# Altium PCB mct5.PcbDoc (part 1 of 3)
Units mil, origin at the board's own origin, x right, y up, seen from the top; angles counter-clockwise.
Board outline 3925 x 3925 mil, 2 copper layers (TopLayer, BottomLayer); 78 components, 100 nets, 891 pads, 16 vias.
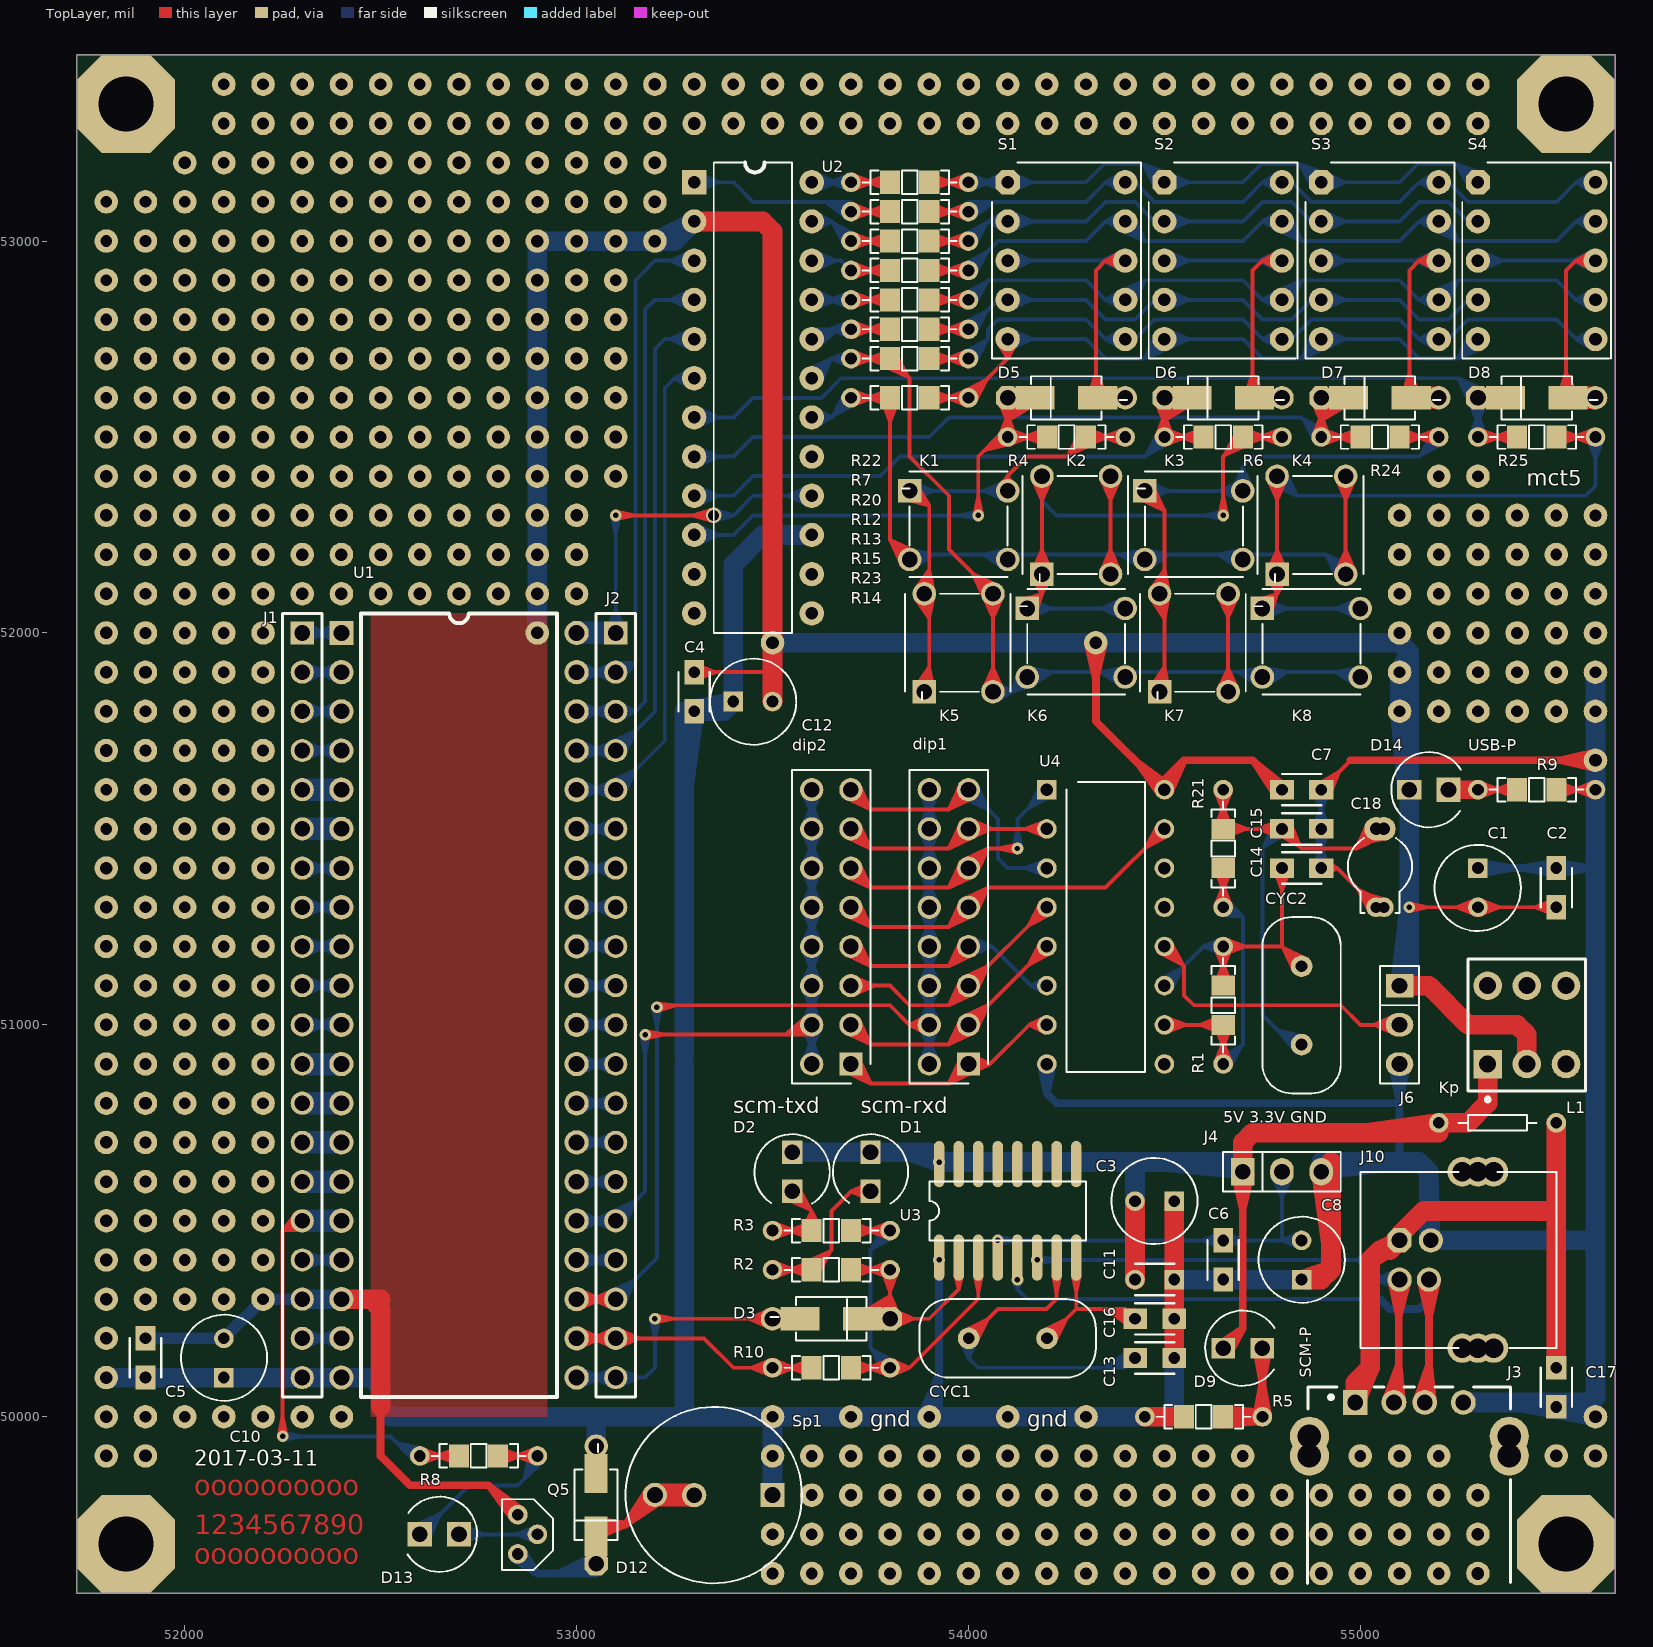
[diagram p0: TopLayer view]
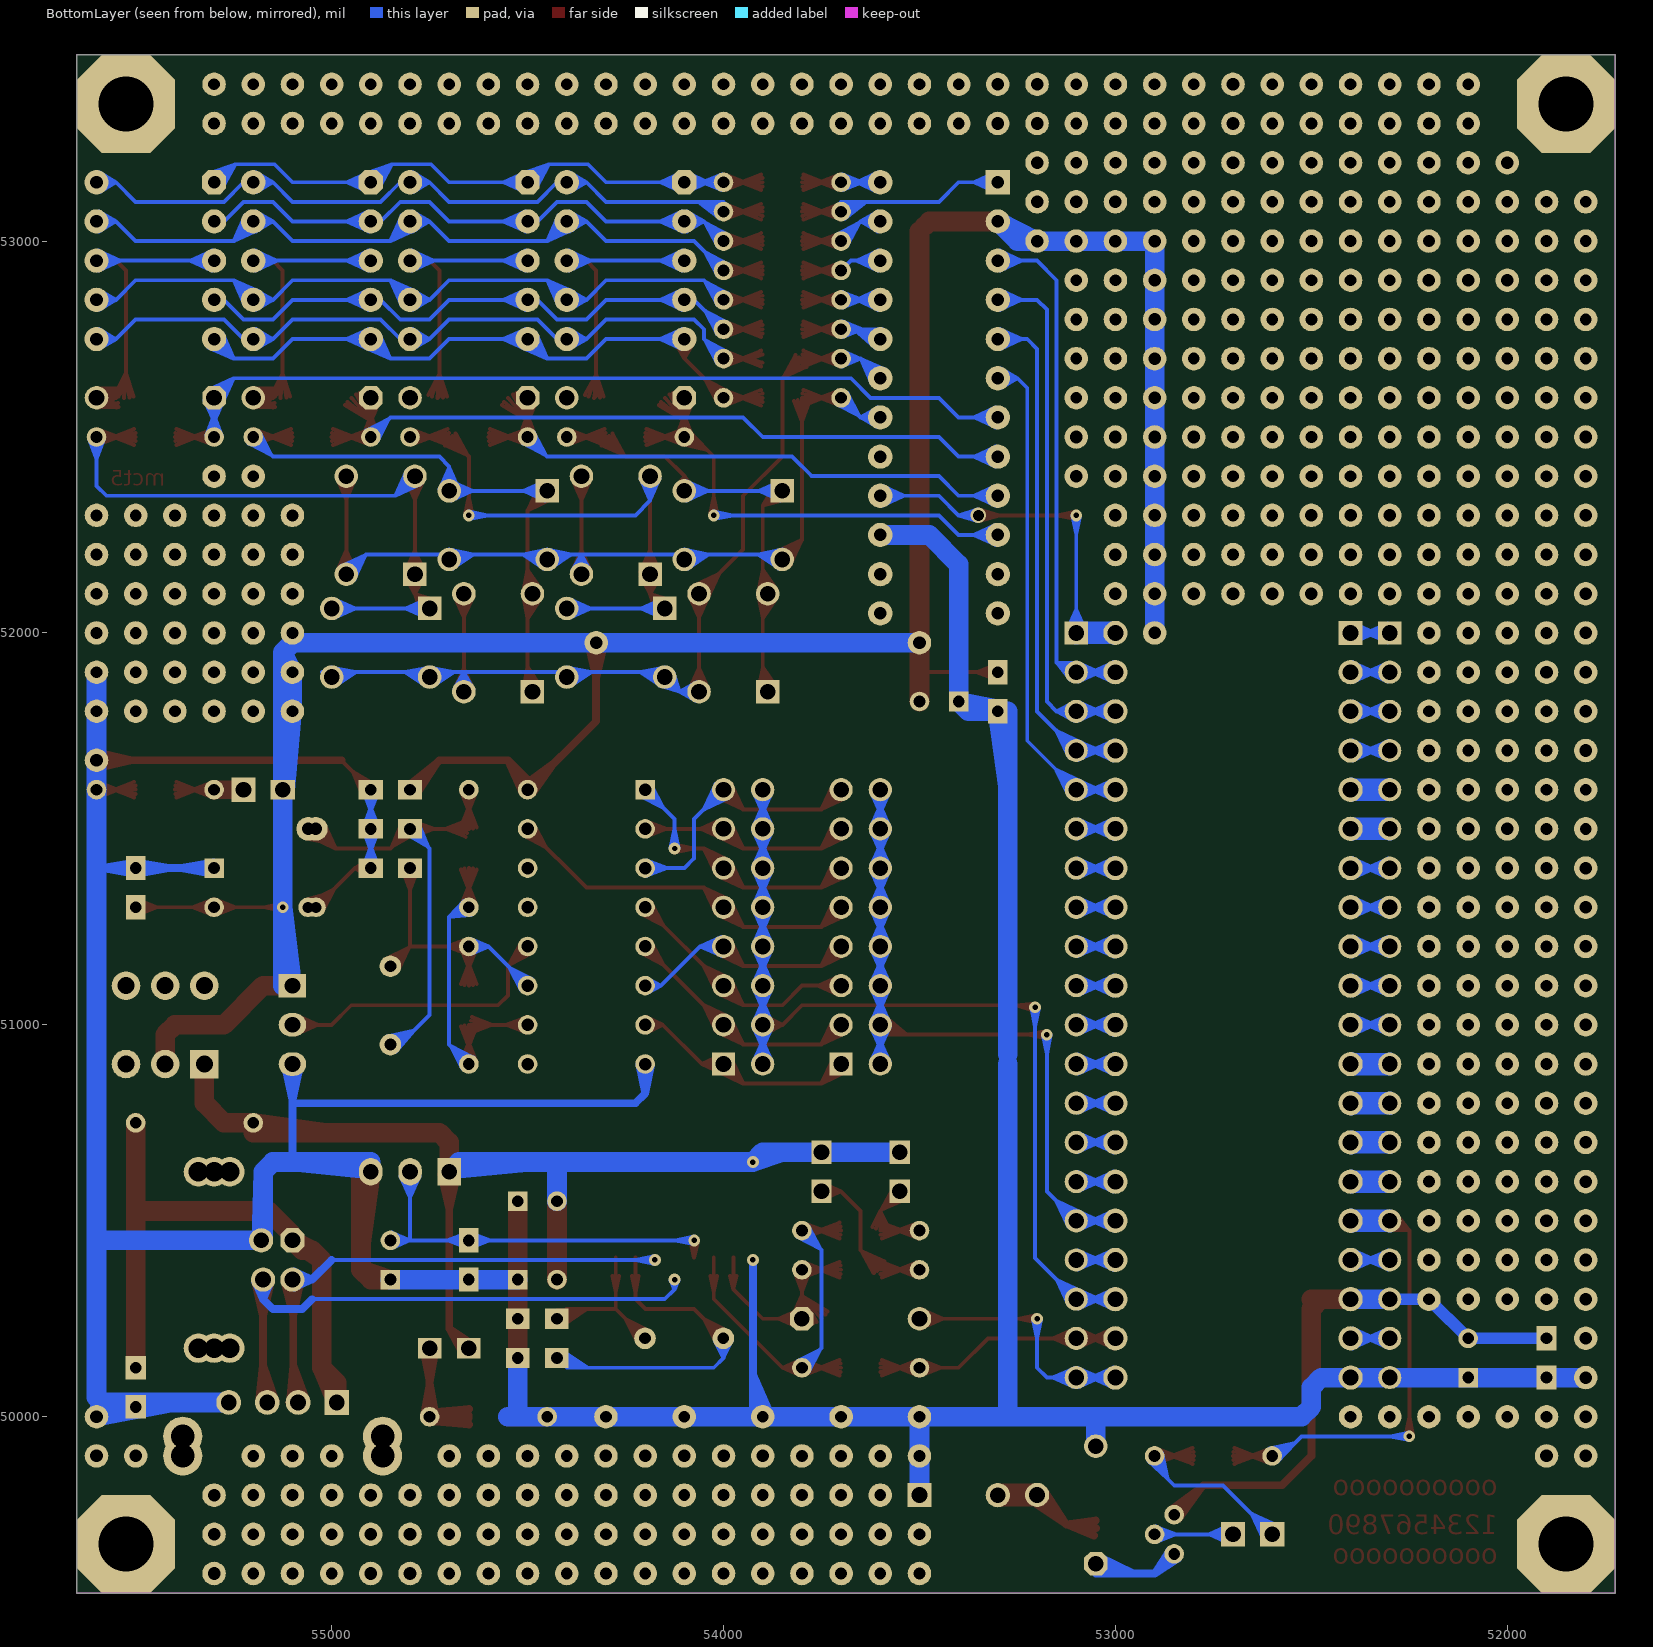
[diagram p1: BottomLayer view, seen from below]

## Layer stack, top to bottom
TopLayer: signal copper 1.4
Dielectric: core 12.6, FR-4, Dk 4.8
BottomLayer: signal copper 1.4

## Board outline
51725,49550 51725,53475 55650,53475 55650,49550

## Design rules (kind name [scope] priority, off if disabled: settings)
AssemblyTestPointUsage [All] p1 off:
AssemblyTestpoint [All] p1 off: testpointundercomponent=TRUE minsize=40 maxsize=100 preferedsize=60 minholesize=0 maxholesize=40 preferedholesize=32 testpointgrid=1 usegrid=TRUE gridtolerance=0.01 allowsidetop=TRUE allowsidebottom=TRUE
Clearance [All] p1: gap=10
ComponentClearance [All] p1 off: gap=10 collisioncheckmode=3 verticalgap=10 showdistances=FALSE
DiffPairsRouting [All] p1 off: maxlimit=10 minlimit=10 mostfreqgap=10 maxuncoupledlength=500
FabricationTestPointUsage TestPointUsage [All] p1 off: valid=0 allowmultiple=FALSE
FabricationTestpoint Testpoint [All] p1 off: side=3 testpointundercomponent=TRUE minsize=40 maxsize=100 preferedsize=60 minholesize=20 maxholesize=40 preferedholesize=32 testpointgrid=1 allowsidetop=TRUE allowsidebottom=TRUE usegrid=TRUE gridtolerance=0.01
FanoutControl Fanout_BGA [IsBGA] p1 off: bgadir=Out bgaviamode=Centered fanoutstyle=Auto fanoutdirection=Alternating viagrid=1 // Fanout_BGA (Default Rule)
FanoutControl Fanout_LCC [IsLCC] p2 off: bgadir=Out bgaviamode=Centered fanoutstyle=Auto fanoutdirection=Alternating viagrid=1 // Fanout_LCC (Default Rule)
FanoutControl Fanout_SOIC [IsSOIC] p3 off: bgadir=Out bgaviamode=Centered fanoutstyle=Auto fanoutdirection=Alternating viagrid=1 // Fanout_SOIC (Default Rule)
FanoutControl Fanout_Small [(CompPinCount < 5)] p4 off: bgadir=Out bgaviamode=Centered fanoutstyle=Auto fanoutdirection=OutThenIn viagrid=1 // Fanout_Small (Default Rule)
FanoutControl Fanout_Default [All] p5 off: bgadir=Out bgaviamode=Centered fanoutstyle=Auto fanoutdirection=Alternating viagrid=1 // Fanout_Default (Default Rule)
Height [All] p1 off: minheight=0 maxheight=1000 prefheight=500
HoleToHoleClearance [All] p1 off: gap=10 allowstackedmicrovias=TRUE
LayerPairs [All] p1 off: enforce=TRUE
MinimumSolderMaskSliver [All] p1 off: minsoldermaskwidth=10
NetAntennae [All] p1 off: netantennaetolerance=0
PasteMaskExpansion [All] p1 off: expansion=0
PlaneClearance [All] p1 off: clearance=20
PlaneConnect [All] p1 off: planeconnectstyle=Relief reliefexpansion=20 reliefentries=4 reliefconductorwidth=10 reliefairgap=10
PolygonConnect [All] p1 off: connectstyle=Relief reliefconductorwidth=10 reliefentries=4 polygonreliefangle="90 Angle"
RoutingPriority [All] p1 off: routingpriority=0
RoutingVias [All] p1: holewidth=28 width=50 viastyle="Through Hole" minholewidth=28 minwidth=50 maxholewidth=28 maxwidth=50
SilkToSilkClearance [All] p1 off: silktosilkclearance=10
SilkscreenOverComponentPads [All] p1 off: minsilkscreentomaskgap=10
SolderMaskExpansion [All] p1 off: expansion=4
Width [All] p1: maxlimit=100 minlimit=10 preferedwidth=30 toplayer_prefwidth=10
Width Width_1 [All] p2 off: maxlimit=100 minlimit=10 preferedwidth=50
Width Width_2 [All] p3 off: maxlimit=100 minlimit=10 preferedwidth=30
6 further rules are at their usual default settings.

## Components (designator, comment, footprint, x,y, rotation, side; value= is the part's Value field where it differs from the comment)
C1 "10u/16v" rb.1/.2 55300,51350 r90 top
C2 "104" cap0.1#1 55500,51300 r90 top
C3 "10u/16v" rb.1/.2 54475,50550 r0 top
C4 "104" cap0.1#1 53300,51900 r270 top
C5 "104" cap0.1#1 51900,50200 r270 top
C6 "104" cap0.1#1 54650,50450 r270 top
C7 "104" cap0.1#1 54800,51600 r0 top
C8 "10u/16v" rb.1/.2 54850,50400 r270 top
C10 "10u/16v" rb.1/.2 52100,50150 r270 top
C11 "104" cap0.1#2 54425,50350 r0 top
C12 "10u/16v" rb.1/.2 53450,51825 r180 top
C13 "104" cap010805 54425,50150 r0 top
C14 "CAP" cap0.1#1 54800,51400 r0 top
C15 "5p" cap0.1#1 54800,51500 r0 top
C16 "" cap010805 54425,50250 r0 top
C17 "104" cap010805 55500,50125 r270 top
C18 "30p" sr2-c 55050,51500 r270 top
CYC1 "12Mhz" cyc-rad 54200,50200 r180 top
CYC2 "2M" cyc-rad 54850,50950 r90 top
D1 "LED" led30805 53750,50625 r270 top
D2 "LED" led30805 53550,50625 r270 top
D3 "sma03" smc03 53800,50250 r180 top
D5 "sma03" smc03 54100,52600 r0 top
D6 "sma03" smc03 54500,52600 r0 top
D7 "sma03" smc03 54900,52600 r0 top
D8 "sma03" smc03 55300,52600 r0 top
D9 "LED" led30805 54700,50175 r0 top
D12 "sma03" smc03 53050,49625 r90 top
D13 "LED" led-3#1 52650,49700 r180 top
D14 "LED" led-3#2 55175,51600 r0 top
dip1 "Header 8X2" HDR2X8 54000,50900 r90 top
dip2 "Header 8X2" HDR2X8 53700,50900 r90 top
J1 "Header 20" HDR1X20 52300,52000 r270 top
J2 "Header 20" HDR1X20 53100,52000 r270 top
J3 "USB-a" usb-a 55125,49925 r270 top
J4 "Header 20" SIP3 54800,50625 r0 top
J6 "CON3" sip3 55100,51000 r270 top
J10 "" USB_b 55100,50450 r90 top
K1 "6-6-5" pb6_6 53975,52275 r0 top
K2 "6-6-5" pb6_6 54275,52275 r90 top
K3 "6-6-5" pb6_6 54575,52275 r0 top
K4 "6-6-5" pb6_6 54875,52275 r90 top
K5 "6-6-5" pb6_6 53975,51975 r90 top
K6 "6-6-5" pb6_6 54275,51975 r0 top
K7 "6-6-5" pb6_6 54575,51975 r90 top
K8 "6-6-5" pb6_6 54875,51975 r0 top
Kp "SW-DPDT" DPDT-6 55424.76,51000 r90 top
L1 "Res2" axial0.3 55500,50750 r180 top (schematic designator R20)
Q5 "8550" to-92a 52850,49750 r270 top
R1 "Res22" a030805 54650,50900 r90 top
R2 "Res2" a030805 53800,50375 r180 top
R3 "Res2" a030805 53800,50475 r180 top
R4 "Res22" a030805 54100,52500 r0 top
R5 "Res2" a030805 54450,50000 r0 top
R6 "Res22" a030805 54500,52500 r0 top
R7 "Res22" a030805 53700,53075 r0 top
R8 "Res22" a030805 52900,49900 r180 top
R9 "Res22" a030805 55600,51600 r180 top
R10 "Res2" a030805 53800,50125 r180 top
R12 "Res22" a030805 53700,52925 r0 top
R13 "Res22" a030805 53700,52850 r0 top
R14 "Res22" a030805 53700,52600 r0 top
R15 "Res22" a030805 53700,52775 r0 top
R20 "Res22" a030805 53700,53000 r0 top
R21 "Res22" a030805 54650,51600 r270 top
R22 "Res22" a030805 53700,53150 r0 top
R23 "Res22" a030805 53700,52700 r0 top
R24 "Res22" a030805 54900,52500 r0 top
R25 "Res22" a030805 55300,52500 r0 top
S1 "3911AH" LED10s 54100,53150 r0 top
S2 "3911AH" LED10s 54500,53150 r0 top
S3 "3911AH" LED10s 54900,53150 r0 top
S4 "3911AH" LED10s 55300,53150 r0 top
Sp1 "SPEAKER" sp0.23 53500,49800 r180 top
U1 "IAP15F2K61S2" DIP40 52400,52000 r0 top
U2 "CH451" dip24 53300,53150 r0 top
U3 "IAP15F2K61S2" SOP-16 53900,50525 r0 top
U4 "4060" dip16 54200,51600 r0 top

## Footprints (in the part's own frame and the unit in brackets; to place one, negate y for a bottom-side part, rotate by r counter-clockwise, add the part's x,y. Pads: shape width x height; smd on the part's side, far side on the other; paste and mask are expansions set on the pad)
a030805 [mm]
  round 1.27 hole 0.762: 1(0,0) 2(7.62,0)
  rect 1.3x1.5 smd: 3(2.54,0) 4(5.08,0)
  silkscreen extent 0.76,-0.76 6.86,0.76
axial0.3 [mil]
  round 50 hole 30: 1(0,0) 2(300,0)
  silkscreen extent 50,-20 250,20
cap0.1#1 [mil]
  rect 62x50 hole 30: 1(0,0) 2(100,0)
  silkscreen extent 0,-40 100,40
cap0.1#2 [mil]
  round 50 hole 30: 1(0,0)
  rect 50x50 hole 30: 2(100,0)
  silkscreen extent 0,-40 100,40
cap010805 [mil] "0.1&0805"
  rect 60x52 hole 30: 1(0,0) 2(100,0)
  silkscreen extent 0,-40 100,40
cyc-rad [mil]
  round 55 hole 30: 1(-0.45,-0.07) 2(199.55,-0.07)
  silkscreen extent -125,-100 325,100
dip16 [mil]
  rect 50x50 hole 32: 1(0,0)
  round 50 hole 32: 2(0,-100) 3(0,-200) 4(0,-300) 5(0,-400) 6(0,-500) 7(0,-600) 8(0,-700) 9(300,-700) 10(300,-600) 11(300,-500) 12(300,-400) 13(300,-300) 14(300,-200) 15(300,-100) 16(300,0)
  silkscreen extent 50,-720 250,20
dip24 [mil]
  rect 62x62 hole 32: 1(0,0)
  round 62 hole 32: 2(0,-100) 3(0,-200) 4(0,-300) 5(0,-400) 6(0,-500) 7(0,-600) 8(0,-700) 9(0,-800) 10(0,-900) 11(0,-1000) 12(0,-1100) 13(300,-1100) 14(300,-1000) 15(300,-900) 16(300,-800) 17(300,-700) 18(300,-600) 19(300,-500) 20(300,-400) 21(300,-300) 22(300,-200) 23(300,-100) 24(300,0)
  silkscreen extent 50,-1150 250,50
DIP40 [mil]
  rect 62x62 hole 40: 1(0,0)
  round 62 hole 40: 2(0,-100) 3(0,-200) 4(0,-300) 5(0,-400) 6(0,-500) 7(0,-600) 8(0,-700) 9(0,-800) 10(0,-900) 11(0,-1000) 12(0,-1100) 13(0,-1200) 14(0,-1300) 15(0,-1400) 16(0,-1500) 17(0,-1600) 18(0,-1700) 19(0,-1800) 20(0,-1900) 21(600,-1900) 22(600,-1800) 23(600,-1700) 24(600,-1600) 25(600,-1500) 26(600,-1400) 27(600,-1300) 28(600,-1200) 29(600,-1100) 30(600,-1000) 31(600,-900) 32(600,-800) 33(600,-700) 34(600,-600) 35(600,-500) 36(600,-400) 37(600,-300) 38(600,-200) 39(600,-100) 40(600,0)
  silkscreen extent 50,-1950 550,50
DPDT-6 [mm] "Double-Pole, Double-Throw Switch; 6 Leads"
  rect 1.85x1.85 hole 1.1: 1(-2.54,2.54)
  round 1.85 hole 1.1: 2(-2.54,0) 3(-2.54,-2.54) 4(2.54,-2.54) 5(2.54,0) 6(2.54,2.54)
  silkscreen extent -4.96,-3.81 4.28,3.81
HDR1X20 [mm] "Connector; Header; 20 Position"
  rect 1.5x1.5 hole 1.016: 1(0,0)
  round 1.5 hole 1.016: 2(2.54,0) 3(5.08,0) 4(7.62,0) 5(10.16,0) 6(12.7,0) 7(15.24,0) 8(17.78,0) 9(20.32,0) 10(22.86,0) 11(25.4,0) 12(27.94,0) 13(30.48,0) 14(33.02,0) 15(35.56,0) 16(38.1,0) 17(40.64,0) 18(43.18,0) 19(45.72,0) 20(48.26,0)
  silkscreen extent -1.27,-1.27 49.53,1.27
HDR2X8 [mm] "Connector; Header; 8x2 Position"
  rect 1.5x1.5 hole 1.016: 1(0,0)
  round 1.5 hole 1.016: 2(0,2.54) 3(2.54,0) 4(2.54,2.54) 5(5.08,0) 6(5.08,2.54) 7(7.62,0) 8(7.62,2.54) 9(10.16,0) 10(10.16,2.54) 11(12.7,0) 12(12.7,2.54) 13(15.24,0) 14(15.24,2.54) 15(17.78,0) 16(17.78,2.54)
  silkscreen extent -1.27,-1.27 19.05,3.81
LED10s [mil]
  oct 62x62 hole 32: 1(0,0)
  round 62 hole 32: 2(0,-100) 3(0,-200) 4(0,-300) 5(0,-400) 6(300,-400) 7(300,-300) 8(300,-200) 9(300,-100) 10(300,0)
  silkscreen extent -40,-450 340,50
led30805 [mil]
  rect 60x52 hole 40: 1(-50,0) 2(50,0)
  silkscreen extent -96,-96 81,96
led-3#1 [mil]
  rect 62x62 hole 40: 1(-50,0) 2(50,0)
  silkscreen extent -96,-96 81,96
led-3#2 [mil]
  rect 62x50 hole 40: 1(-50,0)
  rect 62x62 hole 40: 2(50,0)
  silkscreen extent -96,-96 81,96
pb6_6 [mil] "button"
  rect 60x60 hole 40: 1(-125,87.5)
  round 60 hole 40: 2(-125,-87.5) 3(125,-87.5) 4(125,87.5)
  silkscreen extent -145,-132 125,138
rb.1/.2 [mil]
  rect 50x50 hole 30: 1(50,0)
  round 50 hole 30: 2(-50,0)
  silkscreen extent -110,-110 109,110
SIP3 [mil]
  rect 60x70 hole 40: 1(-100,0)
  oval 60x70 hole 40: 2(0,0) 3(100,0)
  silkscreen extent -150,-50 150,50
sip3 [mil]
  rect 60x70 hole 40: 1(-100,0)
  oval 60x70 hole 40: 2(0,0) 3(100,0)
  silkscreen extent -150,-50 150,50
smc03 [mil]
  oct 60x60 hole 40: 1(0,0)
  round 60 hole 40: 2(300,0)
  rect 100x59.06 smd: 3(70,0) 4(230,0)
  silkscreen extent 60,-55 305,55
SOP-16 [mil] "Small Outline; 16 Leads; Body Width 5.6 mm; Pitch 1.27 mm"
  oval 27x118 smd: 1(25,-119) 2(75,-119) 3(125,-119) 4(175,-119) 5(225,-119) 6(275,-119) 7(325,-119) 8(375,-119) 9(375,119.5) 10(325,119.5) 11(275,119.5) 12(225,119.5) 13(175,119.5) 14(125,119.5) 15(75,119.5) 16(25,119.5)
  silkscreen extent 0,-75 400,75
sp0.23 [mil] "speak sip2-sip3"
  rect 62x62 hole 40: 1(0.09,-0.33)
  round 62 hole 40: 2(200,0) 3(300.09,-0.33)
  silkscreen extent -75,-225 375,225
sr2-c [mil]
  round 60 hole 32: 1(0,10) 1(0,-10)
  round 50 hole 28: 2(200,-10) 2(200,10)
  silkscreen extent 24,-82 215,82
to-92a [mil]
  round 50 hole 30: 1(0,0) 2(50,50) 3(100,0)
  silkscreen extent -39,-40 141,90
usb-a [mm] "Connector; USB, Type A"
  rect 1.6x1.6 hole 1.016: 1(-2.83,-3.5)
  round 1.6 hole 1.016: 2(-2.83,-1) 3(-2.83,1) 4(-2.83,3.5)
  round 2.54 hole 1.524: 5(-0.635,6.477) 5(0.635,6.477) 6(-0.635,-6.477) 6(0.635,-6.477)
  silkscreen extent -3.84,-6.6 8.89,6.57
USB_b [mil]
  oct 62x62 hole 40: 1(0,0)
  round 62 hole 40: 2(-100,0) 3(-100,-75) 4(0,-80)
  round 75 hole 50: 5(-275,-240) 5(-275,-200) 5(-275,-160) 6(175,-200) 6(175,-160) 6(175,-240)
  silkscreen extent -275,-400 175,100

## Part data
C1 C3 C8 C10 C12: library part ELECTRO1, "Electrolytic Capacitor"
C2 C4 C5 C6 C7 C11 C15 C17: library part CAP, "Capacitor"
C13 C16: library part CAP
C14: "Capacitor"
C18: library part CAPVAR, "Variable Capacitor"
CYC1 CYC2: library part CRYSTAL, "Crystal"
dip1 dip2: "Header, 8-Pin, Dual row"
J1 J2: "Header, 20-Pin"
J3 J10: library part CON4, "Connector"
J4: library part CON3, "Connector"
J6: "Connector"
K1 K2 K3 K4 K5 K6 K7 K8: library part SW-PB2
Kp: "Double-Pole, Double-Throw Switch"
L1 R1 R4 R6 R7 R8 R9 R12 R13 R14 R15 R20 R21 R22 R23 R24 R25: "Resistor"
Q5: library part PNP
R2 R3 R5 R10: library part Res22, "Resistor"
S1 S2 S3 S4: library part DS1
Sp1: "SPEAKER sip0.2/0.3"
U1: library part Component_3
U3: library part CH340G

## Free pads (board coordinates)
  round 60 hole 32: 0(51800,50000) 0(52000,51500) 0(52000,52600) 0(52000,52900) 0(52200,51100) 0(52200,51200) 0(52200,52200) 0(52200,52300) 0(52900,52000) 0(53200,53000) 0(53500,51975) 0(55600,51675) 1(51800,49900) 1(52300,52200) 1(52300,52300) 1(53000,53100) 1(54325,51975) 2(51900,49900) 2(52400,52200) 2(52400,52300) 2(53100,53100) 3(52100,51500) 3(52100,52600) 3(52100,52900) 3(53200,53100) 4(51900,50500) 4(51900,50800) 4(51900,51900) 4(52200,51500) 4(52200,52600) 4(52200,52900) 4(52500,52200) 4(52500,52300) 4(53100,53000) 5(53000,53000) 7(52700,53400) 7(52900,53000) 8(52700,53300) 8(52900,52900) 9(52700,53200) 9(52900,52800) 10(52900,52700) 11(52900,52600) 12(52900,52500) 13(52000,53200) 13(52900,52400) 14(52900,52300) 15(52900,52200) 16(52900,52100) 17(52800,52500) 18(52800,52400) 19(52800,52300) 20(52800,52200) 21(52800,52100) 22(52700,52100) 23(52600,52100) 24(52500,52100) 25(52400,52100) 26(52300,52100) 27(51800,51400) 27(51800,52500) 28(51800,51300) 28(51800,52400) 29(51800,51200) 29(51800,52300) 30(51800,51100) 30(51800,52200) 31(51800,51000) 31(51800,52100) 32(51800,50900) 32(51800,52000) 33(51800,50500) 33(51800,50800) 33(51800,51900) 33(53900,49900) 34(51800,50400) 34(51800,50700) 34(51800,51800) 34(54000,49900) 35(51800,50300) 35(51800,50600) 35(51800,51700) 35(54100,49900) 36(53000,52500) 36(54200,49900) 37(53000,52400) 37(54300,49900) 38(53000,52300) 39(53000,52200) 40(53000,52100) 40(55300,49600) 40(55300,49800) 41(53100,52400) 41(54800,49700) 41(55300,49700) 42(53100,52500) 42(54800,49600) 43(51800,50200) 43(55500,49900) 44(55600,49900) 45(53300,53400) 45(55600,50000) 46(53200,53400) 47(53200,53300) 48(53300,53300) 49(53200,53200) 52(54900,49800) 53(54900,49700) 54(54900,49600) 55(51800,50100)
  round 60 hole 30: 0(55100,52000) 0(55200,52100) 1(55300,52100) 2(52000,51600) 2(52000,52700) 2(52000,52800) 2(52000,53000) 2(52000,53100) 2(52200,51300) 2(52200,51400) 2(52200,52400) 2(52200,52500) 2(52300,53200) 2(52300,53300) 2(52300,53400) 2(53100,53200) 2(53100,53300) 2(53100,53400) 2(54100,49800) 2(55400,52100) 3(51900,50000) 3(52300,52400) 3(52300,52500) 3(52400,53200) 3(52400,53300) 3(52400,53400) 3(53400,53300) 3(53400,53400) 3(53500,49600) 3(53500,49700) 3(53600,49600) 3(53600,49700) 3(53700,49600) 3(53700,49700) 3(53800,49600) 3(53800,49700) 3(54200,49800) 3(54400,49600) 3(54400,49700) 3(54500,49600) 3(54500,49700) 3(54600,49600) 3(54700,49600) 3(55000,49700) 3(55000,49900) 3(55100,49700) 3(55100,49900) 3(55200,49700) 3(55200,49900) 3(55500,52100) 4(52000,50000) 4(52400,52400) 4(52400,52500) 4(52500,53200) 4(52500,53300) 4(52500,53400) 4(53500,53300) 4(53500,53400) 4(53900,49600) 4(53900,49700) 4(54300,49800) 4(55600,52100) 5(52100,50000) 5(52100,51600) 5(52100,52700) 5(52100,52800) 5(52100,53000) 5(52100,53100) 5(54000,49600) 5(54000,49700) 5(55600,52000) 6(51900,50300) 6(51900,50400) 6(51900,50600) 6(51900,50700) 6(51900,50900) 6(51900,51000) 6(51900,51700) 6(51900,51800) 6(51900,52000) 6(51900,52100) 6(52200,50000) 6(52200,51600) 6(52200,52700) 6(52200,52800) 6(52200,53000) 6(52200,53100) 6(52500,52400) 6(52500,52500) 6(54100,49600) 6(54100,49700) 6(55500,52000) 7(52000,50300) 7(52000,50400) 7(52000,50500) 7(52000,50600) 7(52000,50700) 7(52000,50800) 7(52000,50900) 7(52000,51000) 7(52000,51700) 7(52000,51800) 7(52000,51900) 7(52000,52000) 7(52000,52100) 7(52300,50000) 7(52300,52600) 7(52300,52700) 7(52300,52800) 7(52300,52900) 7(52300,53000) 7(52300,53100) 7(52600,52200) 7(52600,52300) 7(52600,52400) 7(52600,52500) 7(54200,49600) 7(54200,49700) 7(55400,52000) 7(55600,51800) 8(52100,50300) 8(52100,50400) 8(52100,50500) 8(52100,50600) 8(52100,50700) 8(52100,50800) 8(52100,50900) 8(52100,51000) 8(52100,51700) 8(52100,51800) 8(52100,51900) 8(52100,52000) 8(52100,52100) 8(52400,50000) 8(52400,52600) 8(52400,52700) 8(52400,52800) 8(52400,52900) 8(52400,53000) 8(52400,53100) 8(52700,52200) 8(52700,52300) 8(52700,52400) 8(52700,52500) 8(54300,49600) 8(54300,49700) 8(55300,52000) 8(55500,51800) 9(52200,50300) 9(52200,50400) 9(52200,50500) 9(52200,50600) 9(52200,50700) 9(52200,50800) 9(52200,50900) 9(52200,51000) 9(52200,51700) 9(52200,51800) 9(52200,51900) 9(52200,52000) 9(52200,52100) 9(52500,52600) 9(52500,52700) 9(52500,52800) 9(52500,52900) 9(52500,53000) 9(52500,53100) 9(55400,51800) 10(52600,52600) 10(52600,52700) 10(52600,52800) 10(52600,52900) 10(52600,53000) 10(52600,53100) 10(55300,51800) 11(52700,52600) 11(52700,52700) 11(52700,52800) 11(52700,52900) 11(52700,53000) 11(52700,53100) 11(55200,51800) 12(52800,52600) 12(52800,52700) 12(52800,52800) 12(52800,52900) 12(52800,53000) 12(52800,53100) 12(55200,51900) 13(52900,53100) 13(55100,51800) 14(53000,52600) 14(53000,52700) 14(53000,52800) 14(53000,52900) 14(55100,51900) 15(53100,52600) 15(53100,52700) 15(53100,52800) 15(53100,52900) 15(55200,52000) 16(55100,52100) 16(55200,52400) 16(55300,51900) 16(55300,52400) 17(55100,52200) 17(55100,52300) 17(55400,51900) 18(53600,53300) 18(53600,53400) 18(55200,52200) 18(55200,52300) 18(55500,51900) 19(53700,53300) 19(53700,53400) 19(55300,52200) 19(55300,52300) 19(55600,51900) 20(53800,53300) 20(53800,53400) 20(54600,49900) 20(55400,52200) 20(55400,52300) 21(53900,53300) 21(53900,53400) 21(54700,49900) 21(55500,52200) 21(55500,52300) 22(54000,53300) 22(54000,53400) 22(54700,49800) 22(55600,52200) 22(55600,52300) 23(54100,53300) 23(54100,53400) 23(54600,49800) 24(54200,53300) 24(54200,53400) 24(54600,49700) 25(54300,53300) 25(54300,53400) 25(54700,49700) 26(54400,53300) 26(54400,53400) 26(54800,49800) 27(54300,50000) 27(54500,53300) 27(54500,53400) 28(54100,50000) 28(54600,53300) 28(54600,53400) 29(53900,50000) 29(54700,53300) 29(54700,53400) 30(53700,50000) 30(54800,53300) 30(54800,53400) 31(53500,50000) 31(54900,53300) 31(54900,53400) 32(55000,53300) 32(55000,53400) 33(55100,53300) 33(55100,53400) 34(55200,53300) 34(55200,53400) 35(55300,53300) 35(55300,53400) 36(51900,51400) 36(51900,52500) 36(52600,53400) 36(52800,53400) 37(51900,51300) 37(51900,52400) 37(52600,53300) 37(52800,53300) 38(51800,51600) 38(51800,52700) 38(51800,53000) 38(52000,51300) 38(52000,52400) 38(52100,53300) 38(52900,53300) 39(51800,52800) 39(51800,53100) 39(52000,51400) 39(52000,52500) 39(52100,53400) 39(52900,53400) 40(51900,52800) 40(51900,53100) 40(52100,51400) 40(52100,52500) 40(52200,53400) 40(53000,53400) 41(51900,51600) 41(51900,52700) 41(51900,53000) 41(52100,51300) 41(52100,52400) 41(52200,53300) 41(53000,53300) 42(51900,51500) 42(51900,52600) 42(51900,52900) 42(52100,51100) 42(52100,51200) 42(52100,52200) 42(52100,52300) 42(52200,53200) 42(53000,53200) 42(54000,49800) 43(51800,51500) 43(51800,52600) 43(51800,52900) 43(52000,51100) 43(52000,51200) 43(52000,52200) 43(52000,52300) 43(52100,53200) 43(52900,53200) 43(53900,49800) 44(51900,51100) 44(51900,51200) 44(51900,52200) 44(51900,52300) 44(52600,53200) 44(52800,53200) 44(53500,49900) 44(53600,49800) 44(53600,49900) 44(53700,49800) 44(53700,49900) 44(53800,49800) 44(53800,49900) 44(54400,49800) 44(54400,49900) 44(54500,49800) 44(54500,49900) 44(55000,49600) 44(55000,49800) 44(55100,49600) 44(55100,49800) 44(55200,49600) 44(55200,49800)
  oct 250x250 hole 140: 1(51850,53350) 2(51850,49675) 3(55525,49675) 4(55525,53350)

## Via types
v1: diameter 30, hole 14, TopLayer to BottomLayer, 15 vias
v2: diameter 40, hole 28, TopLayer to BottomLayer, 1 vias

## Nets (pads, with @x,y where several pads share a name; then routed paths per layer and width w, separated by ;. In a path a pad name is that pad's centre, name@x,y a point inside that pad or via, vN(x,y) a via of type N, cw(c..) or ccw(c..) an arc to the next point about the centre after c; other vN are vias at no path point)
A: R7.2 R7.4 S1.10 S2.10 S3.10 S4.10 | length 4451.2
  TopLayer w10: R7.4@53900,53075 R7.2@54000,53075 ; R7.4@53901.01,53064.46 53955.59,53075 ; R7.4@53901.01,53085.54 53955.59,53075 ; R7.4@53903.81,53054.77 53955.59,53075 ; R7.4@53903.81,53095.23 53955.59,53075 ; R7.2@53996.36,53055.33 53945,53075 ; R7.2@53996.36,53094.67 53945,53075 ; R7.2@53999.09,53065.04 53945,53075 ; R7.2@53999.09,53084.96 53945,53075
  BottomLayer w10: R7.2@53995.51,53094.49 54063.91,53100 ; R7.2@53997.05,53084.55 54063.91,53100 ; R7.2@54000,53075 54063.91,53100 ; 54000,53100 54300,53100 54350,53150 ; R7.2@54004.31,53065.98 54063.91,53100 ; R7.2@54009.92,53057.63 54063.91,53100 ; S1.10@54393.24,53124.89 54350,53150 ; S1.10@54393.24,53175.11 54350,53150 ; S1.10@54397.44,53134.21 54350,53150 ; S1.10@54397.44,53165.79 54350,53150 ; S1.10@54399.64,53144.01 54350,53150 ; S1.10@54399.64,53155.99 54350,53150 ; S2.10@54793.24,53124.89 54750,53150 ; S2.10@54793.24,53175.11 54750,53150 ; S2.10@54797.44,53134.21 54750,53150 ; S2.10@54797.44,53165.79 54750,53150 ; S2.10@54799.64,53144.01 54750,53150 ; S2.10@54799.64,53155.99 54750,53150 ; S4.10@55593.24,53124.89 55550,53150 ; S4.10@55593.24,53175.11 55550,53150 ; S4.10@55597.44,53134.21 55550,53150 ; S4.10@55597.44,53165.79 55550,53150 ; S4.10@55599.64,53144.01 55550,53150 ; S4.10@55599.64,53155.99 55550,53150 ; S4.10@55600,53150 55550,53150 ; 54350,53150 S1.10@54400,53150 ; 54350,53150 S1.10@54400,53150 ; S1.10@54400,53150 54425,53150 54475,53100 54700,53100 54750,53150 ; 54750,53150 S2.10@54800,53150 ; 54750,53150 S2.10@54800,53150 ; S2.10@54800,53150 54825,53150 54875,53100 55100,53100 ; 55100,53100 55150,53150 ; 55100,53100 55150,53150 ; 55150,53150 S3.10@55200,53150 ; 55150,53150 S3.10@55200,53150 ; 55150,53150 55193.24,53124.89 55150,53150 ; 55150,53150 55193.24,53175.11 55150,53150 ; 55150,53150 55197.44,53134.21 55150,53150 ; 55150,53150 55197.44,53165.79 55150,53150 ; 55150,53150 55199.64,53144.01 55150,53150 ; 55150,53150 55199.64,53155.99 55150,53150 ; 55150,53150 S3.10@55200,53150 ; 55150,53150 S3.10@55200,53150 ; S3.10@55200,53150 55225,53150 55275,53100 55500,53100 55550,53150
B: R12.2 R12.4 S1.9 S2.9 S3.9 S4.9 | length 5673.3
  TopLayer w10: R12.4@53900,52925 R12.2@54000,52925 ; R12.4@53901.01,52914.46 53955.59,52925 ; R12.4@53901.01,52935.54 53955.59,52925 ; R12.4@53903.81,52904.77 53955.59,52925 ; R12.4@53903.81,52945.23 53955.59,52925 ; R12.2@53996.36,52905.33 53945,52925 ; R12.2@53996.36,52944.67 53945,52925 ; R12.2@53999.09,52915.04 53945,52925 ; R12.2@53999.09,52934.96 53945,52925
  BottomLayer w10: R12.2@53988.19,52941.14 54046.21,52971.21 ; R12.2@53993.49,52932.59 54046.21,52971.21 ; R12.2@54000,52925 54075,53000 54300,53000 54350,53050 ; R12.2@54007.59,52918.49 54046.21,52971.21 ; R12.2@54016.14,52913.19 54046.21,52971.21 ; S1.9@54385.31,53028.55 54450,53000 ; S1.9@54390.04,53037.48 54450,53000 ; S1.9@54393.24,53024.89 54350,53050 ; S1.9@54393.24,53075.11 54350,53050 ; S1.9@54395.94,53045.58 54450,53000 ; S1.9@54397.44,53034.21 54350,53050 ; S1.9@54397.44,53065.79 54350,53050 ; S1.9@54399.64,53044.01 54350,53050 ; S1.9@54399.64,53055.99 54350,53050 ; S1.9@54404.42,53054.06 54450,53000 ; S1.9@54412.52,53059.96 54450,53000 ; S1.9@54421.45,53064.69 54450,53000 ; S2.9@54785.31,53028.55 54850,53000 ; S2.9@54790.04,53037.48 54850,53000 ; S2.9@54793.24,53024.89 54750,53050 ; S2.9@54793.24,53075.11 54750,53050 ; S2.9@54795.94,53045.58 54850,53000 ; S2.9@54797.44,53034.21 54750,53050 ; S2.9@54797.44,53065.79 54750,53050 ; S2.9@54799.64,53044.01 54750,53050 ; S2.9@54799.64,53055.99 54750,53050 ; S2.9@54804.42,53054.06 54850,53000 ; S2.9@54812.52,53059.96 54850,53000 ; S2.9@54821.45,53064.69 54850,53000 ; S3.9@55185.31,53028.55 55250,53000 ; S3.9@55190.04,53037.48 55250,53000 ; S3.9@55195.94,53045.58 55250,53000 ; S3.9@55204.42,53054.06 55250,53000 ; S3.9@55212.52,53059.96 55250,53000 ; S3.9@55221.45,53064.69 55250,53000 ; S4.9@55593.24,53024.89 55550,53050 ; S4.9@55593.24,53075.11 55550,53050 ; S4.9@55597.44,53034.21 55550,53050 ; S4.9@55597.44,53065.79 55550,53050 ; S4.9@55599.64,53044.01 55550,53050 ; S4.9@55599.64,53055.99 55550,53050 ; S4.9@55600,53050 55550,53050 ; 54350,53050 S1.9@54400,53050 ; 54350,53050 S1.9@54400,53050 ; S1.9@54400,53050 54450,53000 ; 54450,53000 54700,53000 54750,53050 ; 54750,53050 S2.9@54800,53050 ; 54750,53050 S2.9@54800,53050 ; S2.9@54800,53050 54850,53000 ; 54850,53000 55100,53000 ; 55100,53000 55150,53050 ; 55100,53000 55150,53050 ; 55150,53050 S3.9@55200,53050 ; 55150,53050 S3.9@55200,53050 ; 55150,53050 55193.24,53024.89 55150,53050 ; 55150,53050 55193.24,53075.11 55150,53050 ; 55150,53050 55197.44,53034.21 55150,53050 ; 55150,53050 55197.44,53065.79 55150,53050 ; 55150,53050 55199.64,53044.01 55150,53050 ; 55150,53050 55199.64,53055.99 55150,53050 ; 55150,53050 S3.9@55200,53050 ; 55150,53050 S3.9@55200,53050 ; S3.9@55200,53050 55250,53000 ; 55250,53000 55500,53000 55550,53050
C: R13.2 R13.4 S1.7 S2.7 S3.7 S4.7 | length 5663
  TopLayer w10: R13.4@53900,52850 R13.2@54000,52850 ; R13.4@53901.01,52839.46 53955.59,52850 ; R13.4@53901.01,52860.54 53955.59,52850 ; R13.4@53903.81,52829.77 53955.59,52850 ; R13.4@53903.81,52870.23 53955.59,52850 ; R13.2@53996.36,52830.33 53945,52850 ; R13.2@53996.36,52869.67 53945,52850 ; R13.2@53999.09,52840.04 53945,52850 ; R13.2@53999.09,52859.96 53945,52850
  BottomLayer w10: R13.2@53988.19,52866.14 54046.21,52896.21 ; R13.2@53993.49,52857.59 54046.21,52896.21 ; R13.2@54000,52850 54050,52900 54300,52900 54350,52850 ; R13.2@54007.59,52843.49 54046.21,52896.21 ; R13.2@54016.14,52838.19 54046.21,52896.21 ; S1.7@54385.31,52871.45 54450,52900 ; S1.7@54390.04,52862.52 54450,52900 ; S1.7@54393.24,52824.89 54350,52850 ; S1.7@54393.24,52875.11 54350,52850 ; S1.7@54395.94,52854.42 54450,52900 ; S1.7@54397.44,52834.21 54350,52850 ; S1.7@54397.44,52865.79 54350,52850 ; S1.7@54399.64,52844.01 54350,52850 ; S1.7@54399.64,52855.99 54350,52850 ; S1.7@54404.42,52845.94 54450,52900 ; S1.7@54412.52,52840.04 54450,52900 ; S1.7@54421.45,52835.31 54450,52900 ; S2.7@54785.31,52871.45 54850,52900 ; S2.7@54790.04,52862.52 54850,52900 ; S2.7@54793.24,52824.89 54750,52850 ; S2.7@54793.24,52875.11 54750,52850 ; S2.7@54795.94,52854.42 54850,52900 ; S2.7@54797.44,52834.21 54750,52850 ; S2.7@54797.44,52865.79 54750,52850 ; S2.7@54799.64,52844.01 54750,52850 ; S2.7@54799.64,52855.99 54750,52850 ; S2.7@54804.42,52845.94 54850,52900 ; S2.7@54812.52,52840.04 54850,52900 ; S2.7@54821.45,52835.31 54850,52900 ; S3.7@55185.31,52871.45 55250,52900 ; S3.7@55190.04,52862.52 55250,52900 ; S3.7@55195.94,52854.42 55250,52900 ; S3.7@55204.42,52845.94 55250,52900 ; S3.7@55212.52,52840.04 55250,52900 ; S3.7@55221.45,52835.31 55250,52900 ; S4.7@55593.24,52824.89 55550,52850 ; S4.7@55593.24,52875.11 55550,52850 ; S4.7@55597.44,52834.21 55550,52850 ; S4.7@55597.44,52865.79 55550,52850 ; S4.7@55599.64,52844.01 55550,52850 ; S4.7@55599.64,52855.99 55550,52850 ; S4.7@55600,52850 55550,52850 ; 54350,52850 S1.7@54400,52850 ; 54350,52850 S1.7@54400,52850 ; S1.7@54400,52850 54450,52900 ; 54450,52900 54700,52900 54750,52850 ; 54750,52850 S2.7@54800,52850 ; 54750,52850 S2.7@54800,52850 ; S2.7@54800,52850 54850,52900 ; 54850,52900 55100,52900 ; 55100,52900 55150,52850 ; 55100,52900 55150,52850 ; 55150,52850 S3.7@55200,52850 ; 55150,52850 S3.7@55200,52850 ; 55150,52850 55193.24,52824.89 55150,52850 ; 55150,52850 55193.24,52875.11 55150,52850 ; 55150,52850 55197.44,52834.21 55150,52850 ; 55150,52850 55197.44,52865.79 55150,52850 ; 55150,52850 55199.64,52844.01 55150,52850 ; 55150,52850 55199.64,52855.99 55150,52850 ; 55150,52850 S3.7@55200,52850 ; 55150,52850 S3.7@55200,52850 ; S3.7@55200,52850 55250,52900 ; 55250,52900 55500,52900 55550,52850
D: R14.2 R14.4 S1.5 S2.5 S3.5 S4.5 | length 5202.4
  TopLayer w10: R14.4@53900,52600 R14.2@54000,52600 54100,52700 ; R14.4@53901.01,52589.46 53955.59,52600 ; R14.4@53901.01,52610.54 53955.59,52600 ; R14.4@53903.81,52579.77 53955.59,52600 ; R14.4@53903.81,52620.23 53955.59,52600 ; R14.2@53988.19,52616.14 54046.21,52646.21 ; R14.2@53993.49,52607.59 54046.21,52646.21 ; R14.2@53996.36,52580.33 53945,52600 ; R14.2@53996.36,52619.67 53945,52600 ; R14.2@53999.09,52590.04 53945,52600 ; R14.2@53999.09,52609.96 53945,52600 ; R14.2@54007.59,52593.49 54046.21,52646.21 ; R14.2@54016.14,52588.19 54046.21,52646.21 ; S1.5@54074.89,52743.24 54100,52700 ; S1.5@54084.21,52747.44 54100,52700 ; S1.5@54094.01,52749.64 54100,52700 ; S1.5@54100,52750 54100,52700 ; S1.5@54105.99,52749.64 54100,52700 ; S1.5@54115.79,52747.44 54100,52700 ; S1.5@54125.11,52743.24 54100,52700
  BottomLayer w10: S1.5@54100,52750 54300,52750 54350,52700 54450,52700 ; S1.5@54100.3,52744.01 54161,52750 ; S1.5@54100.3,52755.99 54161,52750 ; S1.5@54102.1,52734.14 54161,52750 ; S1.5@54102.1,52765.86 54161,52750 ; S1.5@54105.54,52724.6 54161,52750 ; S1.5@54105.54,52775.4 54161,52750 ; S2.5@54478.55,52764.69 54450,52700 ; S2.5@54487.48,52759.96 54450,52700 ; S2.5@54495.58,52754.06 54450,52700 ; S2.5@54500.3,52744.01 54561,52750 ; S2.5@54500.3,52755.99 54561,52750 ; S2.5@54502.1,52734.14 54561,52750 ; S2.5@54502.1,52765.86 54561,52750 ; S2.5@54504.06,52745.58 54450,52700 ; S2.5@54505.54,52724.6 54561,52750 ; S2.5@54505.54,52775.4 54561,52750 ; S2.5@54509.96,52737.48 54450,52700 ; S2.5@54514.69,52728.55 54450,52700 ; S3.5@54878.55,52764.69 54850,52700 ; S3.5@54887.48,52759.96 54850,52700 ; S3.5@54895.58,52754.06 54850,52700 ; S3.5@54900.3,52744.01 54961,52750 ; S3.5@54900.3,52755.99 54961,52750 ; S3.5@54902.1,52734.14 54961,52750 ; S3.5@54902.1,52765.86 54961,52750 ; S3.5@54904.06,52745.58 54850,52700 ; S3.5@54905.54,52724.6 54961,52750 ; S3.5@54905.54,52775.4 54961,52750 ; S3.5@54909.96,52737.48 54850,52700 ; S3.5@54914.69,52728.55 54850,52700 ; S4.5@55278.55,52764.69 55250,52700 ; S4.5@55287.48,52759.96 55250,52700 ; S4.5@55295.58,52754.06 55250,52700 ; S4.5@55304.06,52745.58 55250,52700 ; S4.5@55309.96,52737.48 55250,52700 ; S4.5@55314.69,52728.55 55250,52700 ; 54450,52700 S2.5@54500,52750 ; 54450,52700 S2.5@54500,52750 ; S2.5@54500,52750 54700,52750 54750,52700 54850,52700 ; 54850,52700 S3.5@54900,52750 ; 54850,52700 S3.5@54900,52750 ; S3.5@54900,52750 55100,52750 55150,52700 55250,52700 ; 55250,52700 S4.5@55300,52750 55250,52700
DIG0: U2.14
DIG1: U2.13
DIG2: U2.12
DIG3: U2.11
DIG4: D5.1 D5.3 R4.1 R4.3 U2.10 | length 3422.7
  TopLayer w10: v1@54015.05,52301.02 54025,52349 v1@54034.95,52301.02 ; v1(54025,52300) 54025,52450 54075,52500 R4.1@54100,52500 ; D5.1@54075.55,52594.79 54100,52540 ; R4.1@54080.33,52503.64 54100,52555 ; D5.1@54085.12,52598.12 54100,52540 ; R4.1@54087.62,52515.71 54042,52467 ; R4.1@54090.04,52500.91 54100,52555 ; R4.1@54094.42,52508.3 54042,52467 ; R4.1@54100.91,52490.04 54155,52500 ; R4.1@54100.91,52509.96 54155,52500 ; R4.1@54103.64,52480.33 54155,52500 ; R4.1@54103.64,52519.67 54155,52500 ; R4.1@54104.28,52490.96 54042,52467 ; R4.1@54107.17,52481.33 54042,52467 ; R4.1@54109.96,52500.91 54100,52555 ; D5.1@54114.88,52598.12 54100,52540 ; R4.1@54119.67,52503.64 54100,52555 ; D5.1@54124.45,52594.79 54100,52540 ; D5.1@54128.45,52612.54 54101.33,52542.98 ; D5.3@54137.57,52608.25 54101.33,52542.98 ; D5.3@54149.53,52600 54101.33,52542.98 ; D5.3@54159.66,52589.59 54101.33,52542.98 ; D5.3@54165.4,52581.3 54101.33,52542.98 ; R4.3@54196.19,52479.77 54144.41,52500 ; R4.3@54196.19,52520.23 54144.41,52500 ; R4.3@54198.99,52489.46 54144.41,52500 ; R4.3@54198.99,52510.54 54144.41,52500 ; R4.3@54200,52500 R4.1@54100,52500 ; 54042,52467 R4.1@54100,52500 ; R4.1@54100,52500 D5.1@54100,52600 54100,52540
  BottomLayer w10: U2.10@53300,52250 53400,52250 53450,52300 v1(54025,52300) ; U2.10@53300.3,52244.01 53361,52250 ; U2.10@53300.3,52255.99 53361,52250 ; U2.10@53302.1,52234.14 53361,52250 ; U2.10@53302.1,52265.86 53361,52250 ; U2.10@53305.54,52224.6 53361,52250 ; U2.10@53305.54,52275.4 53361,52250 ; v1@54023.98,52290.05 53976,52300 v1@54023.98,52309.95
DIG5: D6.1 D6.3 R6.1 R6.3 U2.9 | length 3365.2
  TopLayer w10: D6.1@54475.55,52594.79 54500,52540 ; R6.1@54480.33,52503.64 54500,52555 ; D6.1@54485.12,52598.12 54500,52540 ; R6.1@54490.04,52500.91 54500,52555 ; D6.1@54500,52600 R6.1@54500,52500 R6.3@54600,52500 ; R6.1@54500.91,52490.04 54555,52500 ; R6.1@54500.91,52509.96 54555,52500 ; R6.1@54503.64,52480.33 54555,52500 ; R6.1@54503.64,52519.67 54555,52500 ; R6.1@54509.96,52500.91 54500,52555 ; D6.1@54514.88,52598.12 54500,52540 ; R6.1@54519.67,52503.64 54500,52555 ; D6.1@54524.45,52594.79 54500,52540 ; D6.1@54528.45,52612.54 54501.33,52542.98 ; D6.3@54537.57,52608.25 54501.33,52542.98 ; D6.3@54549.53,52600 54501.33,52542.98 ; D6.3@54559.66,52589.59 54501.33,52542.98 ; D6.3@54565.4,52581.3 54501.33,52542.98 ; R6.3@54596.19,52479.77 54544.41,52500 ; R6.3@54596.19,52520.23 54544.41,52500 ; R6.3@54598.99,52489.46 54544.41,52500 ; R6.3@54598.99,52510.54 54544.41,52500
  BottomLayer w10: U2.9@53300,52350 53400,52350 53450,52400 53775,52400 53825,52450 54450,52450 R6.1@54500,52500 ; U2.9@53300.3,52344.01 53361,52350 ; U2.9@53300.3,52355.99 53361,52350 ; U2.9@53302.1,52334.14 53361,52350 ; U2.9@53302.1,52365.86 53361,52350 ; U2.9@53305.54,52324.6 53361,52350 ; U2.9@53305.54,52375.4 53361,52350 ; R6.1@54483.86,52511.81 54453.79,52453.79 ; R6.1@54492.41,52506.51 54453.79,52453.79 ; R6.1@54506.51,52492.41 54453.79,52453.79 ; R6.1@54511.81,52483.86 54453.79,52453.79
DIG6: D7.1 D7.3 R24.1 R24.3 U2.8 | length 3765.2
  TopLayer w10: D7.1@54875.55,52594.79 54900,52540 ; R24.1@54880.33,52503.64 54900,52555 ; D7.1@54885.12,52598.12 54900,52540 ; R24.1@54890.04,52500.91 54900,52555 ; D7.1@54900,52600 R24.1@54900,52500 R24.3@55000,52500 ; R24.1@54900.91,52490.04 54955,52500 ; R24.1@54900.91,52509.96 54955,52500 ; R24.1@54903.64,52480.33 54955,52500 ; R24.1@54903.64,52519.67 54955,52500 ; R24.1@54909.96,52500.91 54900,52555 ; D7.1@54914.88,52598.12 54900,52540 ; R24.1@54919.67,52503.64 54900,52555 ; D7.1@54924.45,52594.79 54900,52540 ; D7.1@54928.45,52612.54 54901.33,52542.98 ; D7.3@54937.57,52608.25 54901.33,52542.98 ; D7.3@54949.53,52600 54901.33,52542.98 ; D7.3@54959.66,52589.59 54901.33,52542.98 ; D7.3@54965.4,52581.3 54901.33,52542.98 ; R24.3@54996.19,52479.77 54944.41,52500 ; R24.3@54996.19,52520.23 54944.41,52500 ; R24.3@54998.99,52489.46 54944.41,52500 ; R24.3@54998.99,52510.54 54944.41,52500
  BottomLayer w10: U2.8@53300,52450 53400,52450 53450,52500 53900,52500 53950,52550 54850,52550 R24.1@54900,52500 ; U2.8@53300.3,52444.01 53361,52450 ; U2.8@53300.3,52455.99 53361,52450 ; U2.8@53302.1,52434.14 53361,52450 ; U2.8@53302.1,52465.86 53361,52450 ; U2.8@53305.54,52424.6 53361,52450 ; U2.8@53305.54,52475.4 53361,52450 ; R24.1@54883.86,52488.19 54853.79,52546.21 ; R24.1@54892.41,52493.49 54853.79,52546.21 ; R24.1@54906.51,52507.59 54853.79,52546.21 ; R24.1@54911.81,52516.14 54853.79,52546.21
DIG7: D8.1 D8.3 R25.1 R25.3 U2.7 | length 3813.3
  TopLayer w10: R25.1@55300,52500 R25.3@55400,52500 ; R25.1@55300.91,52490.04 55355,52500 ; R25.1@55300.91,52509.96 55355,52500 ; R25.1@55303.64,52480.33 55355,52500 ; R25.1@55303.64,52519.67 55355,52500 ; R25.3@55396.19,52479.77 55344.41,52500 ; R25.3@55396.19,52520.23 55344.41,52500 ; R25.3@55398.99,52489.46 55344.41,52500 ; R25.3@55398.99,52510.54 55344.41,52500
  BottomLayer w10: U2.7@53300,52550 53400,52550 53450,52600 53625,52600 53675,52650 55250,52650 ; U2.7@53300.3,52544.01 53361,52550 ; U2.7@53300.3,52555.99 53361,52550 ; U2.7@53302.1,52534.14 53361,52550 ; U2.7@53302.1,52565.86 53361,52550 ; U2.7@53305.54,52524.6 53361,52550 ; U2.7@53305.54,52575.4 53361,52550 ; D8.1@55275.55,52594.79 55300,52540 ; D8.1@55279.48,52585.73 55250,52650 ; R25.1@55280.33,52503.64 55300,52555 ; D8.1@55285.12,52598.12 55300,52540 ; D8.1@55288.33,52590.58 55250,52650 ; R25.1@55290.04,52500.91 55300,52555 ; R25.1@55300,52500 D8.1@55300,52600 55250,52650 ; D8.1@55309.42,52611.67 55250,52650 ; R25.1@55309.96,52500.91 55300,52555 ; D8.1@55314.27,52620.52 55250,52650 ; D8.1@55314.88,52598.12 55300,52540 ; R25.1@55319.67,52503.64 55300,52555 ; D8.1@55324.45,52594.79 55300,52540
DP: R23.2 R23.4 S1.6 S2.6 S3.6 S4.6 | length 4598.9
  TopLayer w10: R23.4@53901.01,52689.46 53955.59,52700 ; R23.4@53901.01,52710.54 53955.59,52700 ; R23.4@53901.98,52689.6 53928.28,52700 ; R23.4@53901.98,52710.4 53928.28,52700 ; R23.4@53903.81,52679.77 53955.59,52700 ; R23.4@53903.81,52720.23 53955.59,52700 ; R23.4@53907.49,52680.82 53928.28,52700 ; R23.4@53907.49,52719.18 53928.28,52700 ; R23.2@53996.36,52680.33 53945,52700 ; R23.2@53996.36,52719.67 53945,52700 ; R23.2@53999.09,52690.04 53945,52700 ; R23.2@53999.09,52709.96 53945,52700 ; 53928.28,52700 R23.2@54000,52700 53945,52700
  BottomLayer w10: R23.2@53988.19,52716.14 54046.21,52746.21 ; R23.2@53993.49,52707.59 54046.21,52746.21 ; R23.2@54000,52715.05 R23.2@54000,52700 ; R23.2@54000,52718.43 R23.2@54000,52700 ; R23.2@54007.59,52693.49 54046.21,52746.21 ; R23.2@54016.14,52688.19 54046.21,52746.21 ; S1.6@54393.24,52724.89 54350,52750 ; S1.6@54393.24,52775.11 54350,52750 ; S1.6@54397.44,52734.21 54350,52750 ; S1.6@54397.44,52765.79 54350,52750 ; S1.6@54399.64,52744.01 54350,52750 ; S1.6@54399.64,52755.99 54350,52750 ; S2.6@54793.24,52724.89 54750,52750 ; S2.6@54793.24,52775.11 54750,52750 ; S2.6@54797.44,52734.21 54750,52750 ; S2.6@54797.44,52765.79 54750,52750 ; S2.6@54799.64,52744.01 54750,52750 ; S2.6@54799.64,52755.99 54750,52750 ; S4.6@55593.24,52724.89 55550,52750 ; S4.6@55593.24,52775.11 55550,52750 ; S4.6@55597.44,52734.21 55550,52750 ; S4.6@55597.44,52765.79 55550,52750 ; S4.6@55599.64,52744.01 55550,52750 ; S4.6@55599.64,52755.99 55550,52750 ; S4.6@55600,52750 55550,52750 ; R23.2@54000,52700 54050,52750 54050,52775 54075,52800 54300,52800 54350,52750 ; 54350,52750 S1.6@54400,52750 ; 54350,52750 S1.6@54400,52750 ; S1.6@54400,52750 54425,52750 54475,52800 54700,52800 54750,52750 ; 54750,52750 S2.6@54800,52750 ; 54750,52750 S2.6@54800,52750 ; S2.6@54800,52750 54825,52750 54875,52800 55100,52800 ; 55100,52800 55150,52750 ; 55100,52800 55150,52750 ; 55150,52750 S3.6@55200,52750 ; 55150,52750 S3.6@55200,52750 ; 55150,52750 55193.24,52724.89 55150,52750 ; 55150,52750 55193.24,52775.11 55150,52750 ; 55150,52750 55197.44,52734.21 55150,52750 ; 55150,52750 55197.44,52765.79 55150,52750 ; 55150,52750 55199.64,52744.01 55150,52750 ; 55150,52750 55199.64,52755.99 55150,52750 ; 55150,52750 S3.6@55200,52750 ; 55150,52750 S3.6@55200,52750 ; S3.6@55200,52750 55225,52750 55275,52800 55500,52800 55550,52750
E: R15.2 R15.4 S1.4 S2.4 S3.4 S4.4 | length 3282.1
  TopLayer w10: R15.4@53900,52775 R15.2@54000,52775 ; R15.4@53901.01,52764.46 53955.59,52775 ; R15.4@53901.01,52785.54 53955.59,52775 ; R15.4@53903.81,52754.77 53955.59,52775 ; R15.4@53903.81,52795.23 53955.59,52775 ; R15.2@53996.36,52755.33 53945,52775 ; R15.2@53996.36,52794.67 53945,52775 ; R15.2@53999.09,52765.04 53945,52775 ; R15.2@53999.09,52784.96 53945,52775
  BottomLayer w10: R15.2@53988.19,52791.14 54046.21,52821.21 ; R15.2@53993.49,52782.59 54046.21,52821.21 ; R15.2@54000,52775 54075,52850 S1.4@54100,52850 54300,52850 54350,52800 54425,52800 S2.4@54475,52850 ; R15.2@54007.59,52768.49 54046.21,52821.21 ; R15.2@54016.14,52763.19 54046.21,52821.21 ; S1.4@54100.3,52844.01 54161,52850 ; S1.4@54100.3,52855.99 54161,52850 ; S1.4@54102.1,52834.14 54161,52850 ; S1.4@54102.1,52865.86 54161,52850 ; S1.4@54105.54,52824.6 54161,52850 ; S1.4@54105.54,52875.4 54161,52850 ; S2.4@54500,52850 54700,52850 54750,52800 54825,52800 S3.4@54875,52850 ; S2.4@54500.3,52844.01 54561,52850 ; S2.4@54500.3,52855.99 54561,52850 ; S2.4@54502.1,52834.14 54561,52850 ; S2.4@54502.1,52865.86 54561,52850 ; S2.4@54505.54,52824.6 54561,52850 ; S2.4@54505.54,52875.4 54561,52850 ; S3.4@54900,52850 55100,52850 55150,52800 55225,52800 S4.4@55275,52850 ; S3.4@54900.3,52844.01 54961,52850 ; S3.4@54900.3,52855.99 54961,52850 ; S3.4@54902.1,52834.14 54961,52850 ; S3.4@54902.1,52865.86 54961,52850 ; S3.4@54905.54,52824.6 54961,52850 ; S3.4@54905.54,52875.4 54961,52850
F: R20.2 R20.4 S1.2 S2.2 S3.2 S4.2 | length 3671.8
  TopLayer w10: R20.4@53900,53000 R20.2@54000,53000 ; R20.4@53901.01,52989.46 53955.59,53000 ; R20.4@53901.01,53010.54 53955.59,53000 ; R20.4@53903.81,52979.77 53955.59,53000 ; R20.4@53903.81,53020.23 53955.59,53000 ; R20.2@53996.36,52980.33 53945,53000 ; R20.2@53996.36,53019.67 53945,53000 ; R20.2@53999.09,52990.04 53945,53000 ; R20.2@53999.09,53009.96 53945,53000
  BottomLayer w10: R20.2@53988.19,53016.14 54046.21,53046.21 ; R20.2@53993.49,53007.59 54046.21,53046.21 ; R20.2@54000,53000 54050,53050 ; R20.2@54007.59,52993.49 54046.21,53046.21 ; R20.2@54016.14,52988.19 54046.21,53046.21 ; S1.2@54075,53050 S1.2@54100,53050 ; S1.2@54093.24,53024.89 54050,53050 ; S1.2@54093.24,53075.11 54050,53050 ; S1.2@54097.44,53034.21 54050,53050 ; S1.2@54097.44,53065.79 54050,53050 ; S1.2@54099.64,53044.01 54050,53050 ; S1.2@54099.64,53055.99 54050,53050 ; S1.2@54100.3,53044.01 54161,53050 ; S1.2@54100.3,53055.99 54161,53050 ; S1.2@54102.1,53034.14 54161,53050 ; S1.2@54102.1,53065.86 54161,53050 ; S1.2@54105.54,53024.6 54161,53050 ; S1.2@54105.54,53075.4 54161,53050 ; S2.2@54500.3,53044.01 54561,53050 ; S2.2@54500.3,53055.99 54561,53050 ; S2.2@54502.1,53034.14 54561,53050 ; S2.2@54502.1,53065.86 54561,53050 ; S2.2@54505.54,53024.6 54561,53050 ; S2.2@54505.54,53075.4 54561,53050 ; S3.2@54900.3,53044.01 54961,53050 ; S3.2@54900.3,53055.99 54961,53050 ; S3.2@54902.1,53034.14 54961,53050 ; S3.2@54902.1,53065.86 54961,53050 ; S3.2@54905.54,53024.6 54961,53050 ; S3.2@54905.54,53075.4 54961,53050 ; S4.2@55300,53050 55275,53050 55225,53100 55150,53100 55100,53050 S3.2@54900,53050 54875,53050 54825,53100 54750,53100 54700,53050 S2.2@54500,53050 54475,53050 54425,53100 54350,53100 54300,53050 S1.2@54100,53050 ; 54050,53050 S1.2@54100,53050
G: R22.2 R22.4 S1.1 S2.1 S3.1 S4.1 | length 5145.6
  TopLayer w10: R22.4@53900,53150 R22.2@54000,53150 ; R22.4@53901.01,53139.46 53955.59,53150 ; R22.4@53901.01,53160.54 53955.59,53150 ; R22.4@53903.81,53129.77 53955.59,53150 ; R22.4@53903.81,53170.23 53955.59,53150 ; R22.2@53996.36,53130.33 53945,53150 ; R22.2@53996.36,53169.67 53945,53150 ; R22.2@53999.09,53140.04 53945,53150 ; R22.2@53999.09,53159.96 53945,53150
  BottomLayer w10: R22.2@54000,53150 S1.1@54100,53150 ; R22.2@54000.91,53140.04 54055,53150 ; R22.2@54000.91,53159.96 54055,53150 ; R22.2@54003.64,53130.33 54055,53150 ; R22.2@54003.64,53169.67 54055,53150 ; S1.1@54092,53150 S1.1@54100,53150 ; S1.1@54094.46,53124.6 54039,53150 ; S1.1@54094.46,53175.4 54039,53150 ; S1.1@54097.9,53134.14 54039,53150 ; S1.1@54097.9,53165.86 54039,53150 ; S1.1@54099.7,53144.01 54039,53150 ; S1.1@54099.7,53155.99 54039,53150 ; S1.1@54100.3,53144.01 54161,53150 ; S1.1@54100.3,53155.99 54161,53150 ; S1.1@54102.1,53134.14 54161,53150 ; S1.1@54102.1,53165.86 54161,53150 ; S1.1@54105.54,53124.6 54161,53150 ; S1.1@54105.54,53175.4 54161,53150 ; S2.1@54479.8,53133.63 54446.02,53195.98 ; S2.1@54488.32,53139.07 54446.02,53195.98 ; S2.1@54495.92,53145.6 54446.02,53195.98 ; S2.1@54500.3,53144.01 54561,53150 ; S2.1@54500.3,53155.99 54561,53150 ; S2.1@54502.1,53134.14 54561,53150 ; S2.1@54502.1,53165.86 54561,53150 ; S2.1@54503.69,53154.73 54446.02,53195.98 ; S2.1@54505.54,53124.6 54561,53150 ; S2.1@54505.54,53175.4 54561,53150 ; S2.1@54508.93,53163.27 54446.02,53195.98 ; S2.1@54512.94,53172.55 54446.02,53195.98 ; S3.1@54879.8,53133.63 54846.02,53195.98 ; S3.1@54888.32,53139.07 54846.02,53195.98 ; S3.1@54895.92,53145.6 54846.02,53195.98 ; S3.1@54900.3,53144.01 54961,53150 ; S3.1@54900.3,53155.99 54961,53150 ; S3.1@54902.1,53134.14 54961,53150 ; S3.1@54902.1,53165.86 54961,53150 ; S3.1@54903.69,53154.73 54846.02,53195.98 ; S3.1@54905.54,53124.6 54961,53150 ; S3.1@54905.54,53175.4 54961,53150 ; S3.1@54908.93,53163.27 54846.02,53195.98 ; S3.1@54912.94,53172.55 54846.02,53195.98 ; S4.1@55279.8,53133.63 55246.02,53195.98 ; S4.1@55288.32,53139.07 55246.02,53195.98 ; S4.1@55295.92,53145.6 55246.02,53195.98 ; S4.1@55303.69,53154.73 55246.02,53195.98 ; S4.1@55308.93,53163.27 55246.02,53195.98 ; S4.1@55312.94,53172.55 55246.02,53195.98 ; S1.1@54100,53150 54300,53150 54346,53196 54446,53196 ; 54446,53196 54492,53150 S2.1@54500,53150 ; 54446.02,53195.98 S2.1@54500,53150 ; S2.1@54500,53150 54700,53150 54746,53196 54750,53196 54846,53196 ; 54846,53196 S3.1@54892,53150 ; 54846.02,53195.98 S3.1@54900,53150 ; S3.1@54892,53150 S3.1@54900,53150 ; S3.1@54892,53150 S3.1@54900,53150 ; S3.1@54900,53150 55100,53150 55146,53196 55150,53196 55246,53196 ; 55246,53196 55292,53150 S4.1@55300,53150 55246.02,53195.98